# Altium PCB RAMP V1-4交流電.PCBDOC
Units mil, origin at the board's own origin, x right, y up, seen from the top; angles counter-clockwise.
Board outline 7415 x 4545 mil, 2 copper layers (Top Layer, Bottom Layer); 99 components, 108 nets, 418 pads, 54 vias.
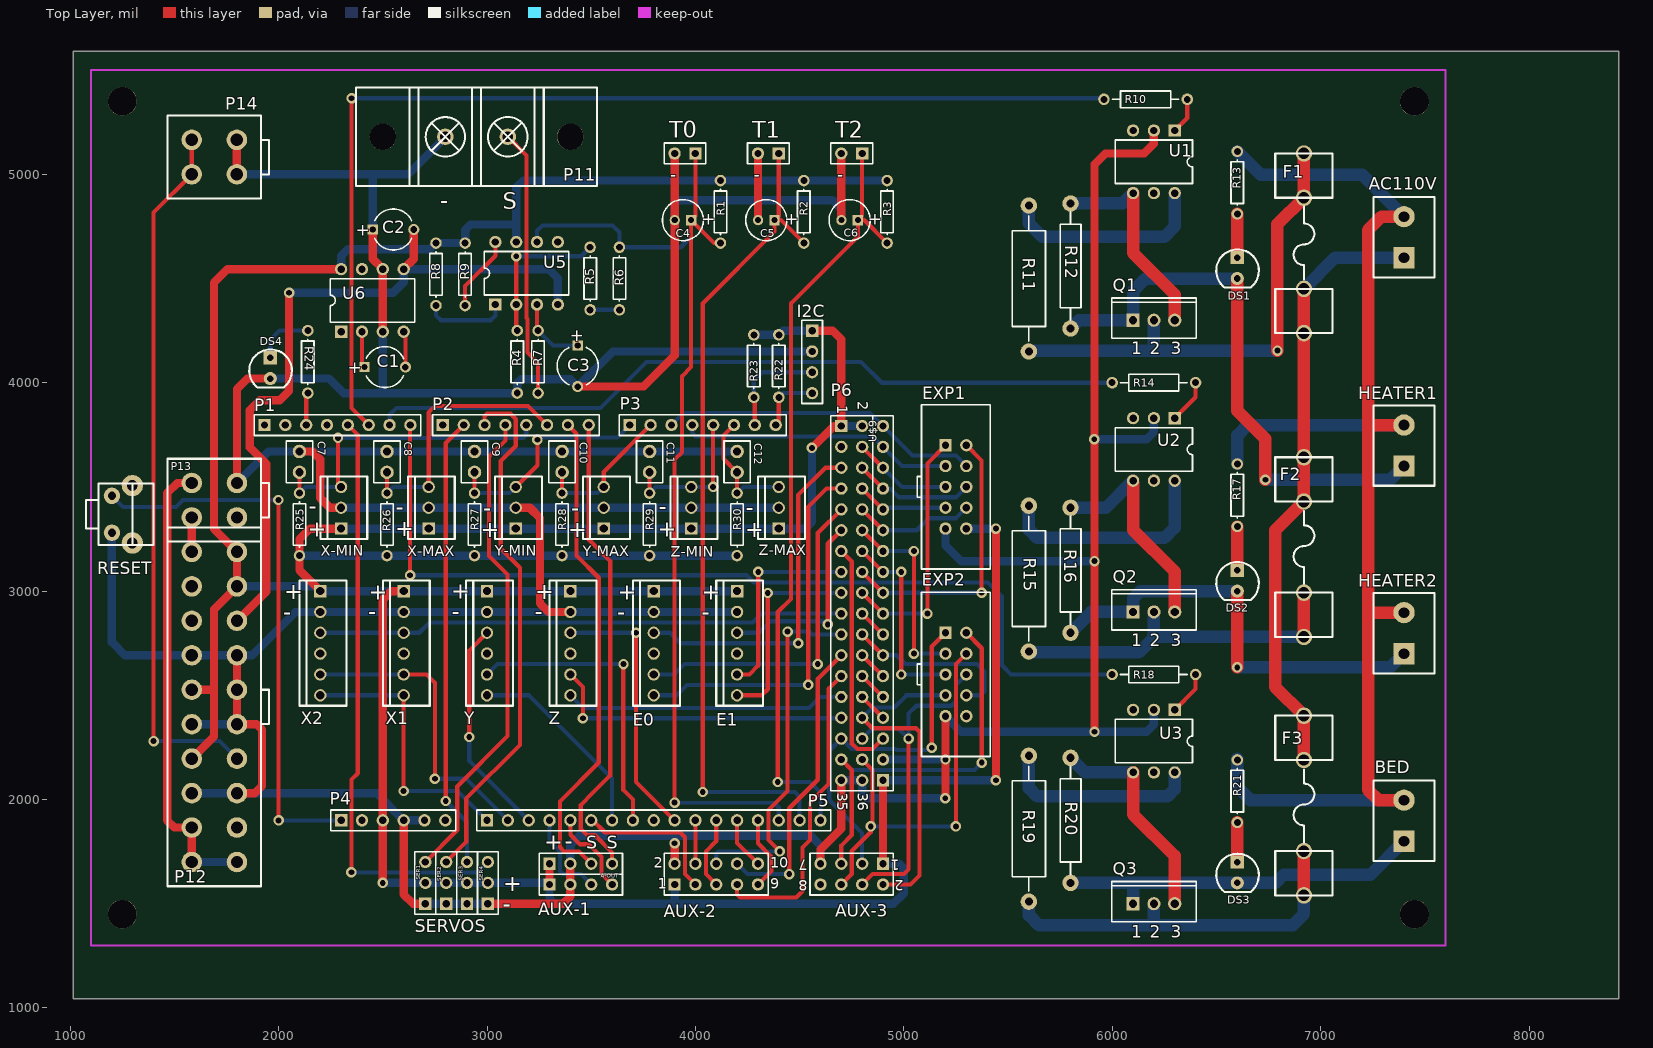
[diagram p0: Top Layer view]
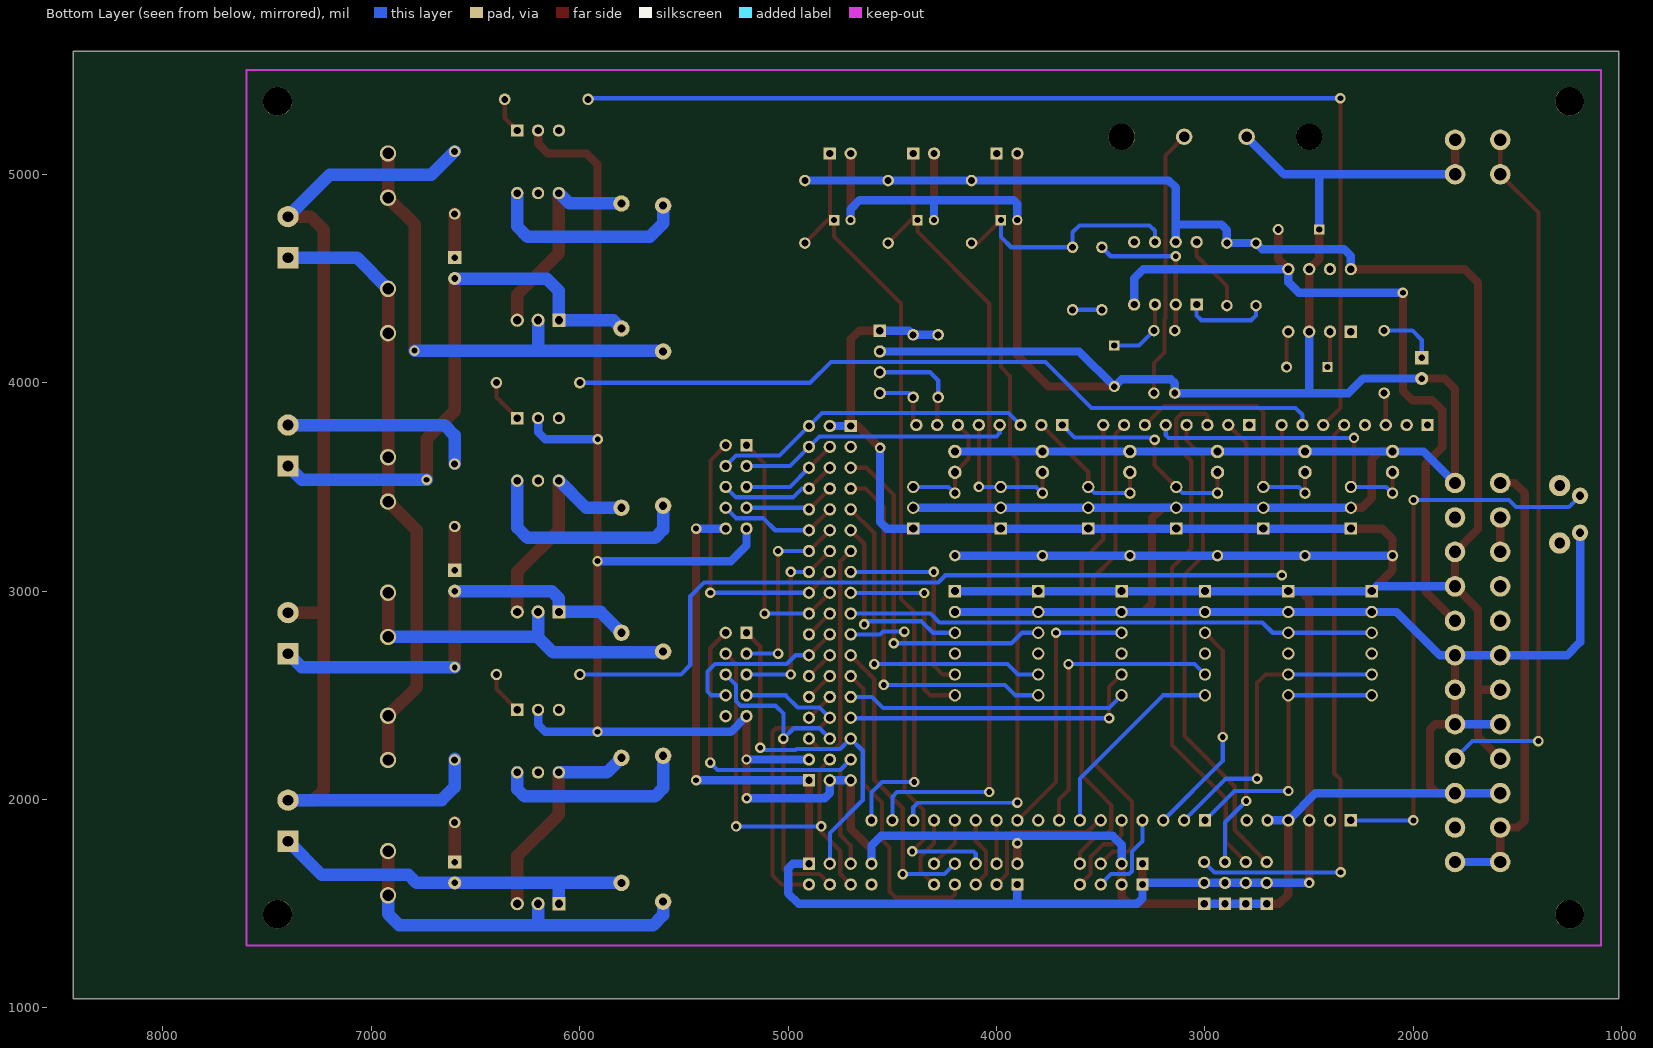
[diagram p1: Bottom Layer view, seen from below]

## Layer stack, top to bottom
Top Layer: signal copper 1.4
Dielectric: dielectric 12.6, FR-4, Dk 4.8
Bottom Layer: signal copper 1.4

## Board outline
1015,1045 1015,5590 8430,5590 8430,1045

## Design rules (kind name [scope] priority, off if disabled: settings)
Clearance [All] p1: gap=10
ComponentClearance [All] p1: gap=10 collisioncheckmode=0
HoleSize [All] p1: absolutevalues=TRUE maxlimit=150 minlimit=1 maxpercent=80.000 minpercent=20.000
PolygonConnect [All] p1: connectstyle=Relief reliefconductorwidth=10 reliefentries=4 polygonreliefangle="90 Angle"
RoutingVias [All] p1: holewidth=28 width=50 viastyle="Through Hole" minholewidth=28 minwidth=50 maxholewidth=28 maxwidth=50
SolderMaskExpansion [All] p1: expansion=4
TestPointUsage [All] p1: valid=0 allowmultiple=FALSE
Testpoint [All] p1: side=15 testpointundercomponent=TRUE minsize=40 maxsize=100 preferedsize=60 minholesize=0 maxholesize=40 preferedholesize=32 testpointgrid=1 style=1023 order=-539222988
Width "AC POWER" [InNetClass('AC POWER')] p1: maxlimit=60 minlimit=10 preferedwidth=60
Width POWER [InNetClass('power')] p2: maxlimit=60 minlimit=10 preferedwidth=40
Width [All] p3: maxlimit=60 minlimit=10 preferedwidth=20
16 further rules are at their usual default settings.

## Classes and differential pairs
net class "AC power": NetAC110V_1 NetAC110V_2 NetBED_1 NetDS1_1 NetDS1_2 NetDS2_1 NetDS2_2 NetDS3_1 NetF1_1 NetF2_1 NetF3_1 NetQ1_3 NetQ2_3 NetQ3_3 NetR11_1 NetR15_1 NetR19_1
net class power: 3V3 +3-3 +5 +12 -5 -12 GND VCC VIN

## Components (designator, comment, footprint, x,y, rotation, side; value= is the part's Value field where it differs from the comment)
A-OUT "Header 4" HDR1X4 3300,1592.13 r0 top
AC110V "Header 2" 2PIN端子-1 7400,4600 r90 top
AUX-1 "Header 4" HDR1X4 3300,1692.13 r0 top
AUX-2 "Header 5X2" HDR2X5 3900,1592.13 r0 top
AUX-3 "Header 4X2" HDR2X4 4900,1692.13 r180 top
BED "Header 2" 2PIN端子-1 7400,1800 r90 top
C1 "Cap Pol1" CAPPR5-5x5 2510,4075 r0 top
C2 "Cap Pol1" CAPPR5-5x5 2550,4735 r0 top
C3 "Cap Pol1" CAPPR5-5x5 3435,4080 r270 top
C4 "Cap Pol1" CAPPR2-5x6.8 3940,4780 r180 top
C5 "Cap Pol1" CAPPR2-5x6.8 4340,4780 r180 top
C6 "Cap Pol1" CAPPR2-5x6.8 4740,4780 r180 top
C7 "Cap" CAPR2.54-5.1x3.2 2100,3620 r270 top
C8 "Cap" CAPR2.54-5.1x3.2 2520,3620 r270 top
C9 "Cap" CAPR2.54-5.1x3.2 2940,3620 r270 top
C10 "Cap" CAPR2.54-5.1x3.2 3360,3620 r270 top
C11 "Cap" CAPR2.54-5.1x3.2 3780,3620 r270 top
C12 "Cap" CAPR2.54-5.1x3.2 4200,3620 r270 top
DS1 "LED0" LED-2 6600,4600 r0 top
DS2 "LED0" LED-2 6600,3100 r0 top
DS3 "LED0" LED-2 6600,1700 r0 top
DS4 "LED0" LED-2 1960,4120 r0 top
E0 "Header 6" "2.54mm 6pin" 3800,2500 r90 top
E1 "Header 6" "2.54mm 6pin" 4200,2500 r90 top
EXP1 "Header 5X2" 10pin牛角公座 5200,3700 r270 top
EXP2 "Header 5X2" 10pin牛角公座 5200,2800 r270 top
F1 "Fuse 2" 保險絲座 6920,5100 r270 top
F2 "Fuse 2" 保險絲座 6920,2780 r90 top
F3 "Fuse 2" 保險絲座 6920,1540 r90 top
HEATER1 "Header 2" 2PIN端子-1 7400,3600 r90 top
HEATER2 "Header 2" 2PIN端子-1 7400,2700 r90 top
I2C "Header 4" HDR1X4 4560,4250 r270 top
P1 "Header 8" HDR1X8 1932.28,3796.85 r0 top
P2 "Header 8" HDR1X8 2788.19,3796.85 r0 top
P3 "Header 8" HDR1X8 3685.04,3796.85 r0 top
P4 "Header 6" HDR1X6 2300,1900 r0 top
P5 "Header 17" HDR1X17 3000,1900 r0 top
P6 "Header 18X2" HDR2X18 4700,3792.13 r270 top
P11 "Header 2" 2PIN端子台有耳 3100,5180 r180 top
P12 "20pin ATX 公座" "4.2mm 20pin" 1800,1700 r90 top
P13 "4pin ATX 公座" "4.2mm 4pin" 1800,3353.54 r90 top
P14 "4pin ATX 公座" "4.2mm 4pin" 1799.54,5000 r90 top
Q1 "BTA08" SFM-T3/X1.6V 6200,4300 r0 top
Q2 "BTA08" SFM-T3/X1.6V 6200,2900 r0 top
Q3 "BTA08" SFM-T3/X1.6V 6200,1500 r0 top
R1 "Res1" AXIAL-0.3 4120,4820 r270 top
R2 "Res1" AXIAL-0.3 4520,4820 r270 top
R3 "Res1" AXIAL-0.3 4920,4820 r270 top
R4 "Res1" AXIAL-0.3 3145,4100 r90 top
R5 "Res1" AXIAL-0.3 3495,4500 r270 top
R6 "Res1" AXIAL-0.3 3635,4500 r90 top
R7 "Res1" AXIAL-0.3 3245,4100 r90 top
R8 "Res1" AXIAL-0.3 2755,4520 r90 top
R9 "Res1" AXIAL-0.3 2895,4520 r270 top
R10 "Res1" AXIAL-0.4 6160,5360 r0 top
R11 "Res1" AXIAL-0.7 5600,4500 r270 top
R12 "Res1" AXIAL-0.6 5800,4560 r90 top
R13 "Res1" AXIAL-0.3 6600,4960 r90 top
R14 "Res1" AXIAL-0.4 6200,4000 r0 top
R15 "Res1" AXIAL-0.7 5600,3060 r270 top
R16 "Res1" AXIAL-0.6 5800,3100 r90 top
R17 "Res1" AXIAL-0.3 6600,3460 r90 top
R18 "Res1" AXIAL-0.4 6200,2600 r0 top
R19 "Res1" AXIAL-0.7 5600,1860 r270 top
R20 "Res1" AXIAL-0.6 5800,1900 r90 top
R21 "Res1" AXIAL-0.3 6600,2040 r90 top
R22 "Res1" AXIAL-0.3 4400,4080 r90 top
R23 "Res1" AXIAL-0.3 4280,4080 r90 top
R24 "Res1" AXIAL-0.3 2140,4100 r270 top
R25 "Res1" AXIAL-0.3 2100,3320 r90 top
R26 "Res1" AXIAL-0.3 2520,3320 r90 top
R27 "Res1" AXIAL-0.3 2940,3320 r90 top
R28 "Res1" AXIAL-0.3 3360,3320 r90 top
R29 "Res1" AXIAL-0.3 3780,3320 r90 top
R30 "Res1" AXIAL-0.3 4200,3320 r90 top
RESET "SW-PB" "SW DIP4-2" 1200,3280 r90 top
SER1 "Header 3" HDR1X3 2704,1500 r90 top
SER2 "Header 3" HDR1X3 2804,1500 r90 top
SER3 "Header 3" HDR1X3 2904,1500 r90 top
SER4 "Header 3" HDR1X3 3004,1500 r90 top
T0 "Header 2" HDR1X2 4000,5100 r180 top
T1 "Header 2" HDR1X2 4400,5100 r180 top
T2 "Header 2" HDR1X2 4800,5100 r180 top
U1 "MOC3023" DIP-6 6200,5060 r180 top
U2 "MOC3023" DIP-6 6200,3680 r180 top
U3 "MOC3023" DIP-6 6200,2280 r180 top
U5 "OP07CP" DIP-8 3190,4525 r0 top
U6 "ICL7660" DIP-8 2450,4395 r0 top
U$9 "Header 18" HDR1X18 4900,2092.13 r90 top
X1 "Header 6" "2.54mm 6pin" 2600,2500 r90 top
X2 "Header 6" "2.54mm 6pin" 2200,2500 r90 top
X-MAX "Header 3" "2.54mm 3pin" 2720,3300 r90 top
X-MIN "Header 3" "2.54mm 3pin" 2300,3300 r90 top
Y "Header 6" "2.54mm 6pin" 3000,2500 r90 top
Y-MAX "Header 3" "2.54mm 3pin" 3560,3300 r90 top
Y-MIN "Header 3" "2.54mm 3pin" 3138,3300 r90 top
Z "Header 6" "2.54mm 6pin" 3400,2500 r90 top
Z-MAX "Header 3" "2.54mm 3pin" 4400,3300 r90 top
Z-MIN "Header 3" "2.54mm 3pin" 3980,3300 r90 top

## Footprints (in the part's own frame and the unit in brackets; to place one, negate y for a bottom-side part, rotate by r counter-clockwise, add the part's x,y. Pads: shape width x height; smd on the part's side, far side on the other; paste and mask are expansions set on the pad)
"2.54mm 3pin" [mm]
  rect 1.5x1.5 hole 1: 1(0,0)
  round 1.5 hole 1: 2(2.54,0) 3(5.08,0)
  silkscreen extent -1.27,-3.18 6.35,2.54
"2.54mm 6pin" [mm]
  rect 1.5x1.5 hole 1: 1(12.7,0)
  round 1.5 hole 1: 2(10.16,0) 3(7.62,0) 4(5.08,0) 5(2.54,0) 6(0,0)
  silkscreen extent -1.27,-3.18 13.97,2.54
2PIN端子-1 [mm]
  rect 2.6x2.6 hole 1.3: 1(0,0)
  round 2.6 hole 1.3: 2(5,0)
  silkscreen extent -2.4,-3.7 7.4,3.7
2PIN端子台有耳 [mm]
  round 3.2 hole 3.2: 0(-7.62,0) 0(15.24,0)
  round 2 hole 1.25: 1(0,0) 2(7.62,0)
  silkscreen extent -10.87,-6 18.49,6
"4.2mm 4pin" [mm]
  round 2.5 hole 1.5: 1(0,5.5) 2(4.2,5.5) 3(0,0) 4(4.2,0)
  silkscreen extent -2.95,-3.9 7.15,8.45
"4.2mm 20pin" [mm]
  round 2.5 hole 1.5: 1(0,5.5) 2(4.2,5.5) 3(8.4,5.5) 4(12.6,5.5) 5(16.8,5.5) 6(21,5.5) 7(25.2,5.5) 8(29.4,5.5) 9(33.6,5.5) 10(37.8,5.5) 11(0,0) 12(4.2,0) 13(8.4,0) 14(12.6,0) 15(16.8,0) 16(21,0) 17(25.2,0) 18(29.4,0) 19(33.6,0) 20(37.8,0)
  silkscreen extent -2.95,-3.9 40.75,8.45
10pin牛角公座 [mm]
  rect 1.5x1.5 hole 0.9: 1(0,0)
  round 1.5 hole 0.9: 2(0,2.54) 3(2.54,0) 4(2.54,2.54) 5(5.08,0) 6(5.08,2.54) 7(7.62,0) 8(7.62,2.54) 9(10.16,0) 10(10.16,2.54)
  silkscreen extent -4.92,-3.43 15.08,5.47
AXIAL-0.3 [mm] "Resistor; 2 Leads"
  round 1.4 hole 0.85: 1(-3.81,0) 2(3.81,0)
  silkscreen extent -2.77,-0.76 2.77,0.76
AXIAL-0.4 [mm] "Resistor; 2 Leads"
  round 1.4 hole 0.85: 1(-5.08,0) 2(5.08,0)
  silkscreen extent -4.06,-1.02 4.06,1.02
AXIAL-0.6 [mm] "Variable Resistor; 2 Leads"
  round 2 hole 1: 1(-7.62,0) 2(7.62,0)
  silkscreen extent -6.6,-1.27 6.6,1.27
AXIAL-0.7 [mm] "Variable Resistor; 2 Leads"
  round 2 hole 1: 1(-8.89,0) 2(8.89,0)
  silkscreen extent -7.62,-2.03 7.62,2.03
CAPPR2-5x6.8 [mm] "Capacitor, Electrolytic, Radial; Body 5 x 6.8 mm (Dia.xH typ); Pin Spacing 2 mm (typ)"
  rect 1.25x1.25 hole 0.75: 1(-1,0)
  round 1.25 hole 0.75: 2(1,0)
  silkscreen extent -2.5,-2.5 2.5,2.5
CAPPR5-5x5 [mm] "Capacitor, Electrolytic, Radial; Body 5 x 5 mm (Dia.xH typ); Pin Spacing 5 mm (typ)"
  rect 1.25x1.25 hole 0.75: 1(-2.5,0)
  round 1.35 hole 0.8: 2(2.5,0)
  silkscreen extent -2.26,-2.5 2.27,2.5
CAPR2.54-5.1x3.2 [mm] "Capacitor, Ceramic, Thru-Hole, Dipped Radial; Body 5.1 x 3.2 mm (WxT) Pin Spacing 2.54 mm (typ)"
  round 1.65 hole 1: 1(-1.27,0) 2(1.27,0)
  silkscreen extent -2.55,-1.6 2.55,1.6
DIP-6 [mm] "DIP; 6 Leads; Row Spacing 7.62 mm; Pitch 2.54 mm"
  rect 1.5x1.5 hole 0.9: 1(-2.54,-3.81)
  round 1.5 hole 0.9: 2(0,-3.81) 3(2.54,-3.81) 4(2.54,3.81) 5(0,3.81) 6(-2.54,3.81)
  silkscreen extent -4.7,-2.65 4.7,2.65
DIP-8 [mm] "DIP; 8 Leads; Row Spacing 7.62 mm; Pitch 2.54 mm"
  rect 1.5x1.5 hole 0.9: 1(-3.81,-3.81)
  round 1.5 hole 0.9: 2(-1.27,-3.81) 3(1.27,-3.81) 4(3.81,-3.81) 5(3.81,3.81) 6(1.27,3.81) 7(-1.27,3.81) 8(-3.81,3.81)
  silkscreen extent -5.15,-2.65 5.15,2.65
HDR1X2 [mm] "Connector; Header; 2 Position"
  rect 1.5x1.5 hole 0.9: 1(0,0)
  round 1.5 hole 0.9: 2(2.54,0)
  silkscreen extent -1.27,-1.27 3.81,1.27
HDR1X3 [mm] "Connector; Header; 3 Position"
  rect 1.5x1.5 hole 0.9: 1(0,0)
  round 1.5 hole 0.9: 2(2.54,0) 3(5.08,0)
  silkscreen extent -1.27,-1.27 6.35,1.27
HDR1X4 [mm] "Connector; Header; 4 Position"
  rect 1.5x1.5 hole 0.9: 1(0,0)
  round 1.5 hole 0.9: 2(2.54,0) 3(5.08,0) 4(7.62,0)
  silkscreen extent -1.27,-1.27 8.89,1.27
HDR1X6 [mm] "Connector; Header; 6 Position"
  rect 1.5x1.5 hole 0.9: 1(0,0)
  round 1.5 hole 0.9: 2(2.54,0) 3(5.08,0) 4(7.62,0) 5(10.16,0) 6(12.7,0)
  silkscreen extent -1.27,-1.27 13.97,1.27
HDR1X8 [mm] "Connector; Header; 8 Position"
  rect 1.5x1.5 hole 0.9: 1(0,0)
  round 1.5 hole 0.9: 2(2.54,0) 3(5.08,0) 4(7.62,0) 5(10.16,0) 6(12.7,0) 7(15.24,0) 8(17.78,0)
  silkscreen extent -1.27,-1.27 19.05,1.27
HDR1X17 [mm] "Connector; Header; 17 Position"
  rect 1.5x1.5 hole 0.9: 1(0,0)
  round 1.5 hole 0.9: 2(2.54,0) 3(5.08,0) 4(7.62,0) 5(10.16,0) 6(12.7,0) 7(15.24,0) 8(17.78,0) 9(20.32,0) 10(22.86,0) 11(25.4,0) 12(27.94,0) 13(30.48,0) 14(33.02,0) 15(35.56,0) 16(38.1,0) 17(40.64,0)
  silkscreen extent -1.27,-1.27 41.91,1.27
HDR1X18 [mm] "Connector; Header; 18 Position"
  rect 1.5x1.5 hole 0.9: 1(0,0)
  round 1.5 hole 0.9: 2(2.54,0) 3(5.08,0) 4(7.62,0) 5(10.16,0) 6(12.7,0) 7(15.24,0) 8(17.78,0) 9(20.32,0) 10(22.86,0) 11(25.4,0) 12(27.94,0) 13(30.48,0) 14(33.02,0) 15(35.56,0) 16(38.1,0) 17(40.64,0) 18(43.18,0)
  silkscreen extent -1.27,-1.27 44.45,1.27
HDR2X4 [mm] "Connector; Header; 4x2 Position"
  rect 1.5x1.5 hole 0.9: 1(0,0)
  round 1.5 hole 0.9: 2(0,2.54) 3(2.54,0) 4(2.54,2.54) 5(5.08,0) 6(5.08,2.54) 7(7.62,0) 8(7.62,2.54)
  silkscreen extent -1.27,-1.27 8.89,3.81
HDR2X5 [mm] "Connector; Header; 5x2 Position"
  rect 1.5x1.5 hole 0.9: 1(0,0)
  round 1.5 hole 0.9: 2(0,2.54) 3(2.54,0) 4(2.54,2.54) 5(5.08,0) 6(5.08,2.54) 7(7.62,0) 8(7.62,2.54) 9(10.16,0) 10(10.16,2.54)
  silkscreen extent -1.27,-1.27 11.43,3.81
HDR2X18 [mm] "Connector; Header; 18x2 Position"
  rect 1.5x1.5 hole 0.9: 1(0,0)
  round 1.5 hole 0.9: 2(0,2.54) 3(2.54,0) 4(2.54,2.54) 5(5.08,0) 6(5.08,2.54) 7(7.62,0) 8(7.62,2.54) 9(10.16,0) 10(10.16,2.54) 11(12.7,0) 12(12.7,2.54) 13(15.24,0) 14(15.24,2.54) 15(17.78,0) 16(17.78,2.54) 17(20.32,0) 18(20.32,2.54) 19(22.86,0) 20(22.86,2.54) 21(25.4,0) 22(25.4,2.54) 23(27.94,0) 24(27.94,2.54) 25(30.48,0) 26(30.48,2.54) 27(33.02,0) 28(33.02,2.54) 29(35.56,0) 30(35.56,2.54) 31(38.1,0) 32(38.1,2.54) 33(40.64,0) 34(40.64,2.54) 35(43.18,0) 36(43.18,2.54)
  silkscreen extent -1.27,-1.27 44.45,3.81
LED-2 [mm]
  rect 1.6x1.6 hole 0.8: 1(0,0)
  round 1.6 hole 0.8: 2(0,-2.54)
  silkscreen extent -2.56,-3.63 2.63,1.01
SFM-T3/X1.6V [mm] "TO, Thru-Hole, Vertical, Heatsink Mounted; 3 In-Line Leads; Pitch 2.54 mm"
  rect 1.6x1.6 hole 1: 1(-2.54,0)
  round 1.6 hole 1: 2(0,0) 3(2.54,0)
  silkscreen extent -5.15,-2.2 5.15,2.7
"SW DIP4-2" [mm]
  round 2 hole 1: 1(4.5,0) 2(0,0)
  round 2.6 hole 1.3: 3(5.75,-2.5) 4(-1.25,-2.5)
  silkscreen extent -1.5,-5.05 6,3.15
保險絲座 [mm]
  round 2 hole 1.4: 1(0,0) 1(5.4,0) 2(16.5,0) 2(21.9,0)
  silkscreen extent 0,-3.5 21.9,3.5

## Part data
A-OUT AUX-1 I2C: "Header, 4-Pin"
AC110V BED HEATER1 HEATER2 P11 T0 T1 T2: "Header, 2-Pin"
AUX-2 EXP1 EXP2: "Header, 5-Pin, Dual row"
AUX-3: "Header, 4-Pin, Dual row"
C1 C2 C3 C4 C5 C6: "Polarized Capacitor (Radial)"
C7 C8 C9 C10 C11 C12: "Capacitor"
DS1 DS2 DS3 DS4: "Typical INFRARED GaAs LED"
E0 E1 P4 X1 X2 Y Z: "Header, 6-Pin"
F1 F2 F3: "Fuse"
P1 P2 P3: "Header, 8-Pin"
P5: "Header, 17-Pin"
P6: "Header, 18-Pin, Dual row"
Q1 Q2 Q3: library part Triac, "Silicon Bidirectional Triode Thyristor"
R1 R2 R3 R4 R5 R6 R7 R8 R9 R10 R11 R12 R13 R14 R15 R16 R17 R18 R19 R20 R21 R22 R23 R24 R25 R26 R27 R28 R29 R30: "Resistor"
RESET: "Switch"
SER1 SER2 SER3 SER4 X-MAX X-MIN Y-MAX Y-MIN Z-MAX Z-MIN: "Header, 3-Pin"
U5: "Ultra-Low Offset Voltage Operational Amplifier"
U$9: "Header, 18-Pin"

## Free pads (board coordinates)
  round 137.8 hole 137.8: 0(1250,5350) 1(1250,1450) 2(7450,1450) 3(7450,5350)

## Via types
v1: diameter 50, hole 28, Top Layer to Bottom Layer, 54 vias

## Nets (pads, with @x,y where several pads share a name; then routed paths per layer and width w, separated by ;. In a path a pad name is that pad's centre, name@x,y a point inside that pad or via, vN(x,y) a via of type N, cw(c..) or ccw(c..) an arc to the next point about the centre after c; other vN are vias at no path point)
3V3: P4.2
+3-3: P12.1 P12.2 P12.11 P13.2 | length 2223.4
  Top Layer w40: P12.1 P12.2 1499.65,1865.35 1465,1900 1465,3470 1513.9,3518.9 P13.2
  Bottom Layer w40: P12.1 P12.11
+5: A-OUT.1 AUX-1.1 AUX-2.1 AUX-3.1 E0.1 E1.1 EXP1.10 I2C.1 P4.3 P6.1 P6.2 P12.4 P12.6 P12.19 P12.20 R1.1 R2.1 R3.1 R8.2 R9.1 R22.2 R23.2 R25.1 R26.1 R27.1 R28.1 R29.1 R30.1 SER1.2 SER2.2 SER3.2 SER4.2 U5.7 U6.8 U$9.1 X1.1 X2.1 X-MAX.1 X-MIN.1 Y-MAX.1 Y-MIN.1 Y.1 Z-MAX.1 Z-MIN.1 Z.1 | length 21792.8
  Top Layer w40: P12.4 1690,2302.6 1690,2912.83 P12.19 P12.20 1690,3298.19 1690,4480 1755,4545 U6.8 ; P12.6 1686.77,2526.77 ; R25.1 2100,3100 X2.1 ; R25.1@2100,3184 2100,3249 2151,3300 X-MIN.1 ; v1(2500,1600) 2500,2961 2539,3000 X1.1 ; A-OUT.1 AUX-1.1@3300,1700 ; v1(4559,3687) 4664.13,3792.13 P6.1 4700,4208 4658,4250 I2C.1 ; AUX-3.1 U$9.1 ; v1(5441.87,2092.13) v1(5442,3300)
  Bottom Layer w40: P12.19 2177.17,3022.83 X2.1 E1.1 ; R25.1 R30.1 ; X-MIN.1 4527,3300 4559,3332 v1(4559,3687) ; U6.8 2300,4608 2333,4641 2726,4641 R8.2 R9.1 2895,4733 2921,4759 3139,4759 ; v1(2500,1600) A-OUT.1@3300,1600 ; U5.7 3140,4936 3174,4970 R3.1 ; A-OUT.1 3300,1525 3325,1500 4950,1500 5000,1550 5000,1670 4977.87,1692.13 AUX-3.1 ; 3900,1500 AUX-2.1 ; R23.2 R22.2 4420,4250 I2C.1 ; P6.1 P6.2 ; U$9.1 v1(5441.87,2092.13) v1@5442,2092 ; EXP1.10 v1(5442,3300)
+12: P12.10 P13.1 | length 165.4
  Top Layer w40: P12.10 P13.1
-5: C2.2 P12.18 U5.4 U6.5 | length 3529.7
  Top Layer w40: P12.18 1941,2998.48 1941,3610 1862,3689 1862,3868 1910,3916 2006,3916 2050,3960 v1(2050,4432) ; U6.5@2598,4545 U6.5 2648.43,4593.43 C2.2
  Bottom Layer w40: v1(2050,4432) 2550,4432 2600,4482 U6.5 3296,4545 3340,4501 U5.4
-12: P12.12
A3: AUX-1.3 P2.7 | length 2346.8
  Top Layer w20: P2.7 3430,3755.04 3430,3170 3536,3064 3536,2177 3350,1991 3350,1771 3370,1751 3441.13,1751 AUX-1.3
A4: AUX-1.4 P2.8 | length 2289.5
  Top Layer w20: P2.8 3488.19,3246.81 3591,3144 3591,2114.99 3506.72,2030.71 3450,1974 3450,1859 3480,1829 3517,1829 3600,1746 AUX-1.4
A5: AUX-2.3 P5.6 | length 731.1
  Top Layer w20: P5.6 3508,1900 3565,1843 3926,1843 3950,1819 3950,1642.13 AUX-2.3
A9: AUX-2.4 P5.11 | length 207.9
  Top Layer w20: AUX-2.4 P5.11
A10: AUX-2.5 P5.12 | length 349.3
  Top Layer w20: AUX-2.5 4050,1642.13 4050,1750 4100,1800 P5.12
A11: AUX-2.10 P5.13 | length 249.3
  Top Layer w20: P5.13 4200,1792.13 AUX-2.10
A12: AUX-2.9 P5.14 | length 361.7
  Top Layer w20: AUX-2.9 4365,1657.13 4365,1725 4300,1790 P5.14
D1: A-OUT.4 P5.5 | length 416.5
  Top Layer w20: P5.5 3400,1831 3446,1785 3490,1785 3550,1725 3550,1642.13 A-OUT.4
D2: A-OUT.3 P5.4 | length 441.2
  Bottom Layer w20: P5.4 3300,1800 3350,1750 3350,1656 3364,1642 3450.13,1642 A-OUT.3
D4: P1.5 SER4.3 | length 2853.2
  Top Layer w20: P1.5 2380,3749.13 2380,2126 2350,2096 v1@2350,1652
  Bottom Layer w20: v1(2349,1651) 2350,1650 2954,1650 SER4.3
D5: P2.2 SER3.3 | length 2174.8
  Top Layer w20: v1(2802,1993) 2802,3710.66 P2.2
  Bottom Layer w20: v1(2802,1993) 2904,1891 SER3.3
D6: P2.3 SER2.3 | length 2547.3
  Top Layer w20: SER2.3 2900,1796 2900,2004 3158,2262 3158,3112 3066,3204 3066,3625 3138,3697 3138,3825 3112,3851 3000.19,3851 2988.19,3839 P2.3
D8: P1.8 R18.1 | length 4482.3
  Top Layer w20: v1(2631,3076) 2631,3795.57 P1.8
  Bottom Layer w20: v1@2630,3075 v1(2631,3076) 4246,3076 4280,3042 5403,3042 5470,2975 5470,2645 5515,2600 R18.1
D9: P1.7 R14.1 | length 3663.7
  Bottom Layer w20: P1.7 2532.28,3846.28 2565,3879 3544,3879 3765,4100 4795,4100 4895,4000 R14.1
D10: P1.6 R10.1 | length 5214.3
  Top Layer w20: v1(2350,5365) 2350,3879.13 P1.6
  Bottom Layer w20: v1(2350,5365) 5955,5365 R10.1
D11: P2.4 SER1.3 | length 2329.7
  Top Layer w20: SER1.3 2857,1853 2857,2062 3099,2304 3099,3080 3010,3169 3010,3645 3088.19,3723.19 P2.4
D12: P1.4
D16: EXP1.4 P3.3 U$9.18 | length 1544.7
  Bottom Layer w20: P3.3 3943.19,3855 4837.13,3855 5042.13,3650 5250,3650 EXP1.4
D17: EXP1.3 P3.4 U$9.17 | length 1319.3
  Bottom Layer w20: P3.4 3985.04,3757.96 4001,3742 4850.13,3742 4992.13,3600 EXP1.3
D23: EXP1.5 P6.4 U$9.16 | length 479.6
  Top Layer w20: P6.4 U$9.16
  Bottom Layer w20: U$9.16 4992.13,3500 EXP1.5
D25: EXP1.6 P6.6 U$9.15 | length 579.6
  Top Layer w20: P6.6 U$9.15
  Bottom Layer w20: U$9.15 4934,3492.13 4976.13,3450 5250,3450 EXP1.6
D27: EXP1.7 P6.8 U$9.14 | length 444.7
  Top Layer w20: P6.8 U$9.14
  Bottom Layer w20: U$9.14 4907.87,3400 EXP1.7
D29: EXP1.8 P6.10 U$9.13 | length 586.1
  Top Layer w20: P6.10 U$9.13
  Bottom Layer w20: U$9.13 5062.13,3292.13 5120,3350 5250,3350 EXP1.8
D31: EXP2.3 P6.12 U$9.12 | length 933.4
  Top Layer w20: P6.12 U$9.12 ; v1(5048,2700) v1(5048,3192)
  Bottom Layer w20: U$9.12 5032.87,3192.13 v1(5048,3192) ; v1(5048,2700) EXP2.3
D32: P6.13 U$9.3 | length 1125.8
  Top Layer w20: P6.13 4750,3142.13 4750,2269 4777,2242 4849.87,2242 U$9.3
D33: EXP2.5 P6.14 U$9.11 | length 933.4
  Top Layer w20: P6.14 U$9.11 ; v1(4988,2600) v1(4988,3092)
  Bottom Layer w20: U$9.11 v1(4988,3092) ; v1(4988,2600) EXP2.5
D35: EXP1.2 P6.16 U$9.10 | length 1352.7
  Top Layer w20: P6.16 U$9.10 ; EXP1.2 5373,3627 v1(5373,2992)
  Bottom Layer w20: U$9.10 4900.13,2992 v1(5373,2992)
D37: EXP1.1 P6.18 U$9.9 | length 1376.4
  Top Layer w20: P6.18 U$9.9 ; v1(5113,2892) 5113,3613 EXP1.1
  Bottom Layer w20: 5077.87,2892.13 U$9.9 4900.13,2892 v1(5113,2892)
D39: P6.20 U$9.8 | length 141.4
  Top Layer w20: P6.20 U$9.8
D40: AUX-2.6 P6.21 | length 1737.1
  Top Layer w20: v1(4405,1751) 4350,1806 4350,1949 4442,2041 v1(4442,2806)
  Bottom Layer w20: AUX-2.6 4100,1740 4111,1751 v1(4405,1751) ; v1(4442,2806) 4545,2806 4558.87,2792.13 P6.21
D41: EXP2.8 P6.22 U$9.7 | length 850.7
  Top Layer w20: P6.22 U$9.7
  Bottom Layer w20: U$9.7 4964.87,2692.13 5007,2650 5351,2650 5387,2614 5387,2519 5368,2500 EXP2.8
D42: AUX-2.8 P6.23 | length 1424.4
  Top Layer w20: v1(4450,1642) 4450,1958 4587,2095 4587,2579.13 P6.23
  Bottom Layer w20: AUX-2.8 4250.13,1642 v1(4450,1642)
D43: P6.24 U$9.6 | length 141.4
  Top Layer w20: P6.24 U$9.6
D44: AUX-2.7 P6.25 | length 1496.8
  Top Layer w20: AUX-2.7@4200,1600 4200,1545 4215,1530 4484,1530 4514,1560 4514,1769 4550,1805 4550,1986 4639,2075 4639,2531.13 P6.25
D45: P6.26 U$9.5 | length 141.4
  Top Layer w20: P6.26 U$9.5
D47: P6.28 U$9.4 | length 141.4
  Top Layer w20: P6.28 U$9.4
D49: AUX-3.2 EXP2.7 P6.30 | length 1630.2
  Top Layer w20: P6.30 4850.13,2342 5058,2342 5075,2325 5075,1635 5032.13,1592.13 AUX-3.2
  Bottom Layer w20: P6.30 4849.87,2442 4954,2442 5012,2500 EXP2.7
D53: AUX-3.6 EXP2.4 P6.34 | length 1941.6
  Top Layer w20: AUX-3.6 4750,1642.13 4750,1752 4841,1843 v1(4841,1871) 4850,1880 4850,2142.13 P6.34 ; v1(5250,1871) 5250,2650 EXP2.4
  Bottom Layer w20: v1(4841,1871) v1(5250,1871)
E0-DIR: E0.5 P6.9 | length 1596.6
  Top Layer w20: v1(4587,2650) 4587,3279.13 P6.9
  Bottom Layer w20: E0.5 3898,2600 3948,2650 v1(4587,2650)
E0-EN: E0.3 P6.5 | length 1686
  Top Layer w20: v1(4493,2750) 4493,3461 4624.13,3592.13 P6.5
  Bottom Layer w20: E0.3 3878,2800 3928,2750 v1(4493,2750)
E0-STEP: E0.6 P6.7 | length 1811.2
  Top Layer w20: v1(4541,2550) 4541,3404 4629.13,3492.13 P6.7
  Bottom Layer w20: E0.6 3909,2500 3959,2550 v1(4541,2550)
E1-DIR: E1.5 P6.15 | length 967.4
  Top Layer w20: E1.5 4259,2600 4301.13,2642.13 v1(4301.13,3092.13)
  Bottom Layer w20: v1(4301.13,3092.13) P6.15
E1-EN: E1.3 P6.11 | length 943
  Top Layer w20: v1(4635,2840) 4635,3227.13 P6.11
  Bottom Layer w20: E1.3 4305,2800 4360,2855 4620,2855 v1(4635,2840)
E1-STEP: E1.6 P6.17 | length 974
  Top Layer w20: E1.6 4318,2500 4347,2529 v1(4347,2991)
  Bottom Layer w20: v1(4347,2991) P6.17
GND: A-OUT.2 AUX-1.2 AUX-2.2 AUX-3.7 C2.1 C3.2 C4.2 C5.2 C6.2 C7.1 C8.1 C9.1 C10.1 C11.1 C12.1 DS4.2 E0.2 E1.2 EXP1.9 EXP2.9 I2C.2 P4.4 P4.5 P6.35 P6.36 P11.2 P12.3 P12.5 P12.7 P12.13 P12.15 P12.16 P12.17 P13.4 P14.3 P14.4 R4.1 RESET.2 SER1.1 SER2.1 SER3.1 SER4.1 T0.2 T1.2 T2.2 U1.2 U2.2 U3.2 U6.3 U6.6 U$9.2 X1.2 X2.2 X-MAX.2 X-MIN.2 Y-MAX.2 Y-MIN.2 Y.2 Z-MAX.2 Z-MIN.2 Z.2 | length 30500.9
  Top Layer w40: P14.3 P14.4 ; P12.13 1885.71,2030.71 1920,2065 1920,2335 1893.58,2361.42 P12.15 P12.17 ; P13.4 1800,3970 1850,4020 DS4.2 ; C7.1 2162,3670 2199,3633 2199,3448 2247,3400 X-MIN.2 ; C2.1 2451.57,4593.43 U6.6 U6.3 ; P4.4 2600,1545 2645,1500 SER1.1 ; SER4.1 3365,1500 3400,1535 AUX-1.2@3400,1700 ; Y-MIN.2 3205,3400 3254,3351 3254,2941 3295,2900 Z.2 ; C3.2 3751.57,3981.57 3900.63,4130.63 C4.2 ; AUX-2.2 v1(3900,1790) ; C4.2@3900,4780.63 T0.2 ; C5.2@4300,4780.63 T1.2 ; AUX-3.7 4600,1760 4700,1860 P6.35 ; T2.2 4700,4780.63 C6.2 ; v1(5199,2006) 5199.87,2006.87 v1(5199.87,2192.13) 5200,2192.25 EXP2.9 ; v1(5915,2325) 5915,5048 5967,5100 6153,5100 6200,5147 U1.2
  Bottom Layer w40: RESET.2 1200,2755 1262.87,2692.13 1872.13,2692.13 2080,2900 E1.2 ; P12.3 2469.29,2030.71 P4.4 P4.5 ; P12.5 P12.15 ; P14.3 2620,5000 P11.2 ; P13.4 1951.1,3670 C12.1 ; DS4.2 2241,4020 2311,3950 R4.1 3145,3998 3163,4016 3400.57,4016 C3.2 3603.43,4150 I2C.2 ; X-MIN.2 Z-MAX.2 ; C2.1 2451.57,4996.43 ; 2500,3950 U6.3 ; SER1.1@2709,1500 SER4.1 ; AUX-1.2 3400,1783 3443,1826 4554,1826 4600,1780 AUX-3.7 ; v1(3900,1790) 3900,1826 ; C4.2 3900.63,4857.63 3919,4876 4657,4876 4700.63,4832.37 C6.2 ; C5.2@4300,4780.63 4300,4875 ; P6.35 P6.36 4800,2031 4825,2006 v1(5199,2006) ; U$9.2 v1(5199.87,2192.13) v1@5200,2192 ; EXP2.9 5275,2325 6165,2325 6200,2360 U3.2 ; EXP1.9 5200,3219 5275,3144 v1(5915,3144) ; v1(5914,3729) 6166,3729 6200,3763 U2.2
MISO: AUX-3.3 EXP2.1 P6.31 | length 1728.5
  Top Layer w20: v1(5134,2248) 5134,2734 EXP2.1
  Bottom Layer w20: AUX-3.3 4800,1839 4642,1997 4642,2234.13 P6.31 4750.13,2242 4960,2242 4965,2237 5114,2237 v1(5134,2248)
MOSI: AUX-3.4 EXP2.6 P6.32 | length 1665.1
  Top Layer w20: AUX-3.4 4850.47,1642.6 5000.6,1642.6 5023,1665 v1(5023,2292)
  Bottom Layer w20: P6.32 4849.87,2342 4973,2342 v1(5023,2292) 5023,2412 5061,2450 5228,2450 5250,2472 5250,2550 EXP2.6
NetAC110V_1: AC110V.1 F1.2 F2.2 F3.2 | length 2917.1
  Top Layer w60: F3.2@6920,2189.61 6920,2402.2 6782,2540.2 6782,3291.61 6920,3429.61 F1.2@6920,4450.39
  Bottom Layer w60: F1.2@6920,4450.39 7069.61,4600 AC110V.1
NetAC110V_2: AC110V.2 BED.2 HEATER1.2 HEATER2.2 R13.2 R17.2 R21.2 | length 6265.7
  Top Layer w60: 7229.85,2896.85 HEATER2.2 ; 7230.15,3796.85 HEATER1.2 ; BED.2 7277.15,1996.85 7228,2046 7228,4732 7292.85,4796.85 AC110V.2
  Bottom Layer w60: R21.2@6600,2195 6600,2060 6663.15,1996.85 BED.2 ; R17.2 6600,3747 6649.85,3796.85 HEATER1.2 ; R13.2 6713,4997 7199.85,4997 AC110V.2
NetBED_1: BED.1 DS3.2 Q3.1 R20.1 | length 1781.8
  Bottom Layer w60: R20.1 6783,1600 6822,1639 7239,1639 BED.1 ; Q3.1 6100,1599
NetC1_1: C1.1 U6.2 | length 174.8
  Top Layer w20: U6.2 2400,4086.57 C1.1
NetC1_2: C1.2 U6.4 | length 173.5
  Top Layer w20: U6.4 2608.43,4236.57 C1.2
NetC3_1: C3.1 R7.2 U5.3 | length 346.7
  Top Layer w20: U5.3 3240,4255 R7.2
  Bottom Layer w20: R7.2 3316.57,4178.43 C3.1
NetDS1_1: DS1.1 R13.1 | length 210
  Top Layer w60: DS1.1 R13.1
NetDS1_2: DS1.2 HEATER1.1 Q1.1 R12.1 | length 2696.3
  Top Layer w60: DS1.2 6600,3865 6735,3730 v1(6735,3534)
  Bottom Layer w60: R12.1 5840,4300 Q1.1 6100,4441 6159,4500 DS1.2 ; v1(6735,3534) 7334,3534 HEATER1.1
NetDS2_1: DS2.1 R17.1 | length 210
  Top Layer w60: DS2.1 R17.1
NetDS2_2: DS2.2 HEATER2.1 Q2.1 R16.1 | length 2114.3
  Top Layer w60: v1(6600,2634) DS2.2
  Bottom Layer w60: R16.1 5900,2900 Q2.1 6100,2965 6135,3000 DS2.2 ; v1(6600,2634) 7334,2634 HEATER2.1
NetDS3_1: DS3.1 R21.1 | length 190
  Top Layer w60: DS3.1 R21.1
NetDS4_1: DS4.1 R24.1 | length 283.6
  Bottom Layer w20: DS4.1 1960,4205 2005,4250 R24.1
NetF1_1: F1.1 Q1.2 R11.2 | length 2339.3
  Top Layer w60: v1(6793,4154) 6793,4760.4 6920,4887.4 F1.1@6920,5100
  Bottom Layer w60: R11.2 5604,4154 v1(6793,4154) ; 6200,4154 Q1.2
NetF2_1: F2.1 Q2.2 R15.2 | length 1686.9
  Top Layer w60: F2.1@6920,2780 F2.1@6920,2992.6
  Bottom Layer w60: R15.2 5604,2706 6128,2706 6202,2780 F2.1@6920,2780 ; 6200,2778 Q2.2
NetF3_1: F3.1 Q3.2 R19.2 | length 1832.7
  Top Layer w60: F3.1@6920,1540 F3.1@6920,1752.6
  Bottom Layer w60: R19.2 5600,1445 5649,1396 6199,1396 ; Q3.2 6200,1396 6865,1396 6920,1451 F3.1@6920,1540
NetP1_3: P1.3 R24.2 | length 156.3
  Top Layer w20: P1.3 2132.28,3942.28 R24.2
NetP11_1: P11.1 R7.1 | length 1290.1
  Top Layer w20: P11.1 3190,5090 3190,4310 3195,4305 3195,4145 3245,4095 R7.1
NetP12_14: P12.14 P14.1 P14.2 | length 3395.9
  Top Layer w20: v1(1400,2280) 1400,4817 P14.1 P14.2
  Bottom Layer w20: v1(1400,2280) 1716.06,2280 P12.14
NetQ1_3: Q1.3 R12.2 U1.4 | length 1013.6
  Top Layer w60: U1.4 6100,4623 6300,4423 Q1.3
  Bottom Layer w60: R12.2 6050,4860 U1.4
NetQ2_3: Q2.3 R16.2 U2.4 | length 1054.7
  Top Layer w60: U2.4@6100,3518 6100,3294 6300,3094 Q2.3
  Bottom Layer w60: R16.2 5970,3400 U2.4
NetQ3_3: Q3.3 R20.2 U3.4 | length 1041.8
  Top Layer w60: U3.4 6100,1929 6300,1729 Q3.3
  Bottom Layer w60: R20.2 5870,2130 U3.4
NetR4_2: R4.2 R5.1 U5.2 | length 731.9
  Top Layer w20: v1(3140,4607) 3140,4255 R4.2
  Bottom Layer w20: v1(3140,4607) 3452,4607 R5.1
NetR5_2: R5.2 R6.1 | length 140
  Bottom Layer w20: R5.2 R6.1
NetR8_1: R8.1 U5.1 | length 403.6
  Bottom Layer w20: R8.1 2755,4323 2778,4300 3018,4300 3040,4322 U5.1
NetR9_2: R9.2 U5.8 | length 365.1
  Top Layer w20: R9.2 2895,4464 3040,4609 U5.8
NetR10_2: R10.2 U1.1 | length 174.9
  Top Layer w20: U1.1 6360,5270 R10.2
NetR11_1: R11.1 U1.6 | length 992.6
  Bottom Layer w60: R11.1 5600,4765 5665,4700 6250,4700 6300,4750 U1.6
NetR14_2: R14.2 U2.1 | length 211.4
  Top Layer w20: U2.1 6400,3930 R14.2
NetR15_1: R15.1 U2.6 | length 1077.3
  Bottom Layer w60: R15.1 5600,3295 5640,3255 6250,3255 6300,3305 U2.6
NetR18_2: R18.2 U3.1 | length 211.4
  Top Layer w20: U3.1 6400,2530 R18.2
NetR19_1: R19.1 U3.6 | length 966.1
  Bottom Layer w60: R19.1 5600,2055 5640,2015 6265,2015 6300,2050 U3.6
RESET: P4.1 RESET.1 | length 2672.5
  Top Layer w20: v1(1999,3437) v1(2000,1900)
  Bottom Layer w20: RESET.1 1254.17,3403 1507,3403 1541,3437 v1(1999,3437) ; v1(2000,1900) P4.1
SCK: AUX-3.5 EXP2.2 P6.33 | length 1904.3
  Top Layer w20: AUX-3.5 4700,1780 4750,1830 4750,2142.13 P6.33 ; EXP2.2 5374,2726 v1(5374,2177)
  Bottom Layer w20: P6.33 4750.13,2142 5339,2142 v1(5374,2177)
SCL: I2C.4 P3.8 R22.1 | length 307.6
  Top Layer w20: P3.8 4400,3811.81 R22.1
  Bottom Layer w20: R22.1 4420,3950 I2C.4
SDA: I2C.3 P3.7 R23.1 | length 511.8
  Top Layer w20: R23.1 4285.04,3924.96 P3.7
  Bottom Layer w20: R23.1 4280,4010 4320,4050 I2C.3
T0: C4.1 P5.15 R1.2 R6.2 T0.1 U5.6 | length 4874.7
  Top Layer w20: v1(3900,1985) 3900,3631 3935,3666 3935,4030.63 3979.37,4075 C4.1 4089.37,4670 R1.2 ; C4.1@4000,4800.63 T0.1
  Bottom Layer w20: U5.6 3240,4729 3266,4755 3602,4755 3635,4722 R6.2 3929.37,4650 3979.37,4700 C4.1 ; v1(3900,1985) 4379,1983 4400,1962 P5.15
T1: C5.1 P5.16 R2.2 T1.1 | length 3988.9
  Top Layer w20: v1(4035,2036) 4035,4380.63 4379.37,4725 C5.1 ; T1.1 4400,4800.63 C5.1 ; R2.2 4410,4780 C5.1
  Bottom Layer w20: v1(4035,2036) 4477,2036 4500,2013 P5.16
T2: C6.1 P5.17 R3.2 T2.1 | length 3729.7
  Top Layer w20: v1(4395,2084) 4395,2899 4458,2962 4458,4381 4779.37,4702.37 C6.1 ; T2.1 4800,4800.63 C6.1 ; R3.2 4810,4780 C6.1
  Bottom Layer w20: v1(4395,2084) 4550,2084 4600,2034 P5.17
VCC: P13.3
VIN: P4.6
X-DIR: P5.2 X1.5 X2.5 | length 1466.5
  Top Layer w20: X1.5@2605,2605 X1.5 2710,2600 2750,2560 v1(2750,2100)
  Bottom Layer w20: X2.5 X1.5 ; v1(2750,2100) 2900,2100 P5.2
X-EN: P6.19 X1.3 X2.3 | length 2538.2
  Bottom Layer w20: X2.3 2675,2800 2725,2850 4275,2850 4317.13,2892.13 P6.19
X-MAX: C8.2 P2.6 R26.2 X-MAX.3 | length 1288.2
  Top Layer w20: R26.2 C8.2 ; X-MAX.3 2720,3857 2751,3888 3197.04,3888 P2.6
  Bottom Layer w20: R26.2 2550,3500 X-MAX.3
X-MIN: C7.2 P2.5 R25.2 X-MIN.3 | length 1511
  Top Layer w20: R25.2 C7.2 ; v1(2285,3735) 2285,3515 X-MIN.3
  Bottom Layer w20: R25.2 2130,3500 X-MIN.3 ; v1(2285,3735) 3175,3735 3188.19,3748.19 P2.5
X-STEP: P5.1 X1.6 X2.6 | length 1317.4
  Top Layer w20: v1(2600,2041) X1.6
  Bottom Layer w20: X2.6 X1.6 ; v1(2600,2041) 2859,2041 P5.1
Y-DIR: P5.8 Y.5 | length 1445.2
  Top Layer w20: v1(3655,2650) 3654,2649 3654,2046 3700,2000 P5.8
  Bottom Layer w20: Y.5 3050,2650 v1(3655,2650)
Y-EN: P5.3 Y.3 | length 1053.3
  Top Layer w20: v1(2915,2300) 2915,2715 Y.3
  Bottom Layer w20: v1(2915,2300) 2915,2185 P5.3
Y-MAX: C10.2 P3.2 R28.2 Y-MAX.3 | length 702.5
  Top Layer w20: R28.2 C10.2 ; Y-MAX.3 3560,3571.81 P3.2
  Bottom Layer w20: R28.2 3530,3470 Y-MAX.3
Y-MIN: C9.2 P3.1 R27.2 Y-MIN.3 | length 1051.9
  Top Layer w20: R27.2 C9.2 ; Y-MIN.3 3242,3604 v1(3242,3726)
  Bottom Layer w20: R27.2 3108,3470 Y-MIN.3 ; v1(3242,3726) 3253,3737 3625.19,3737 P3.1
Y-STEP: P5.7 Y.6 | length 966.3
  Bottom Layer w20: Y.6 3201,2500 3600,2101 P5.7
Z-DIR: P6.29 Z.5 | length 1475.7
  Top Layer w20: Z.5 3460,2540 v1(3460,2390)
  Bottom Layer w20: v1(3460,2390) 4697.87,2390 P6.29
Z-EN: P5.10 Z.3 | length 1291.6
  Top Layer w20: v1(3715,2800) 3715,2085 P5.10
  Bottom Layer w20: Z.3 v1(3715,2800)
Z-MAX: C12.2 P3.6 R30.2 Z-MAX.3 | length 595
  Top Layer w20: P3.6 4135,3746.81 4135,3635 C12.2 R30.2
  Bottom Layer w20: P3.6 P3.6@4185.04,3804.96 ; R30.2 4230,3500 Z-MAX.3
Z-MIN: C11.2 P3.5 R29.2 Z-MIN.3 | length 714.3
  Top Layer w20: R29.2 C11.2 ; v1(4085.04,3500.04) P3.5
  Bottom Layer w20: R29.2 3810,3500 Z-MIN.3 Z-MIN.3 v1(4085.04,3500.04)
Z-STEP: P6.27 Z.6 | length 1347.3
  Bottom Layer w20: Z.6 3461,2439 4544,2439 4597.13,2492.13 P6.27
pads on no net: AUX-3.8 E0.4 E1.4 EXP2.10 P1.1 P1.2 P2.1 P5.9 P6.3 P11.0 P12.8 P12.9 RESET.3 RESET.4 U1.3 U1.5 U2.3 U2.5 U3.3 U3.5 U5.5 U6.1 U6.7 X1.4 X2.4 Y.4 Z.4

## Keep-outs
Keep-Out Layer:
  lines w10: 1100,1300 1100,5500 7600,5500 7600,1300 1100,1300

## Silkscreen, mask and mechanical layers (free items; w line width, h text height)
Top Overlay:
  text "-" at 3879,4970 h60
  text "-" at 4281,4970 h60
  text "-" at 4681,4970 h60
  text "-" at 2775,4834 h78.74
  text "S" at 3075,4832 h78.74
  text "-" at 2144,3370 h78.74
  text "-" at 3824,3366 h78.74
  text "-" at 2563,3363 h78.74
  text "-" at 4242,3361 h78.74
  text "-" at 2981,3359 h78.74
  text "-" at 3405,3359 h78.74
  text "+" at 2559,3263 h78.74
  text "+" at 2140,3261 h78.74
  text "+" at 3820,3261 h78.74
  text "+" at 2970,3258 h78.74
  text "+" at 3390,3258 h78.74
  text "+" at 4240,3258 h78.74
  text "+" at 2828,2963 h78.74
  text "+" at 2027,2961 h78.74
  text "+" at 3232,2961 h78.74
  text "+" at 2432,2959 h78.74
  text "+" at 3628,2959 h78.74
  text "+" at 4030,2959 h78.74
  text "-" at 2430,2863 h78.74
  text "-" at 2830,2863 h78.74
  text "-" at 3228,2863 h78.74
  text "-" at 3626,2861 h78.74
  text "-" at 2023,2859 h78.74
  text "-" at 4030,2859 h78.74
  text "S" at 3476,1764 h60.63
  text "S" at 3574,1764 h60.63
  text "-" at 3373,1761 h78.74
  text "+" at 3274,1760 h78.74
  text "+" at 3079,1561 h78.74
  text "-" at 3076,1460 h78.74
  text "SERVOS" at 2653,1362 h60.63

## Text inside footprints (layer, text, board x,y; h text height)
AUX-2: Top Overlay "2" at 3800,1672.13 h50; Top Overlay "1" at 3820,1572.13 h50; Top Overlay "9" at 4360,1572.13 h50; Top Overlay "10" at 4360,1672.13 h50
AUX-3: Top Overlay "8" at 4540,1612.13 h50 r180; Top Overlay "7" at 4540,1712.13 h50 r180; Top Overlay "1" at 4980,1712.13 h50 r180; Top Overlay "2" at 5000,1612.13 h50 r180
C1: Top Overlay "+" at 2330.87,4045.47 h59.06
C2: Top Overlay "+" at 2370.87,4705.47 h59.06
C3: Top Overlay "+" at 3405.47,4259.13 h59.06 r270
C4: Top Overlay "+" at 4096.5,4809.53 h59.06 r180
C5: Top Overlay "+" at 4496.5,4809.53 h59.06 r180
C6: Top Overlay "+" at 4896.5,4809.53 h59.06 r180
P6: Top Overlay "2" at 4780,3912.13 h50 r270; Top Overlay "1" at 4680,3892.13 h50 r270; Top Overlay "35" at 4680,2032.13 h50 r270; Top Overlay "36" at 4780,2032.13 h50 r270
Q1: Top Overlay "1" at 6090.16,4135.63 h59.06; Top Overlay "2" at 6180.31,4135.63 h59.06; Top Overlay "3" at 6280.31,4135.63 h59.06
Q2: Top Overlay "1" at 6090.16,2735.63 h59.06; Top Overlay "2" at 6180.31,2735.63 h59.06; Top Overlay "3" at 6280.31,2735.63 h59.06
Q3: Top Overlay "1" at 6090.16,1335.63 h59.06; Top Overlay "2" at 6180.31,1335.63 h59.06; Top Overlay "3" at 6280.31,1335.63 h59.06